# Altium PCB SPI-主板-开关.PcbDoc (part 3 of 11)
Units mm, origin at the board's own origin, x right, y up, seen from the top; angles counter-clockwise.
Board outline 97.69 x 103.45 mm, 2 copper layers (Top Layer, Bottom Layer); 86 components, 63 nets, 260 pads, 250 vias.
Unrouted connection lines stored in the file: 6.
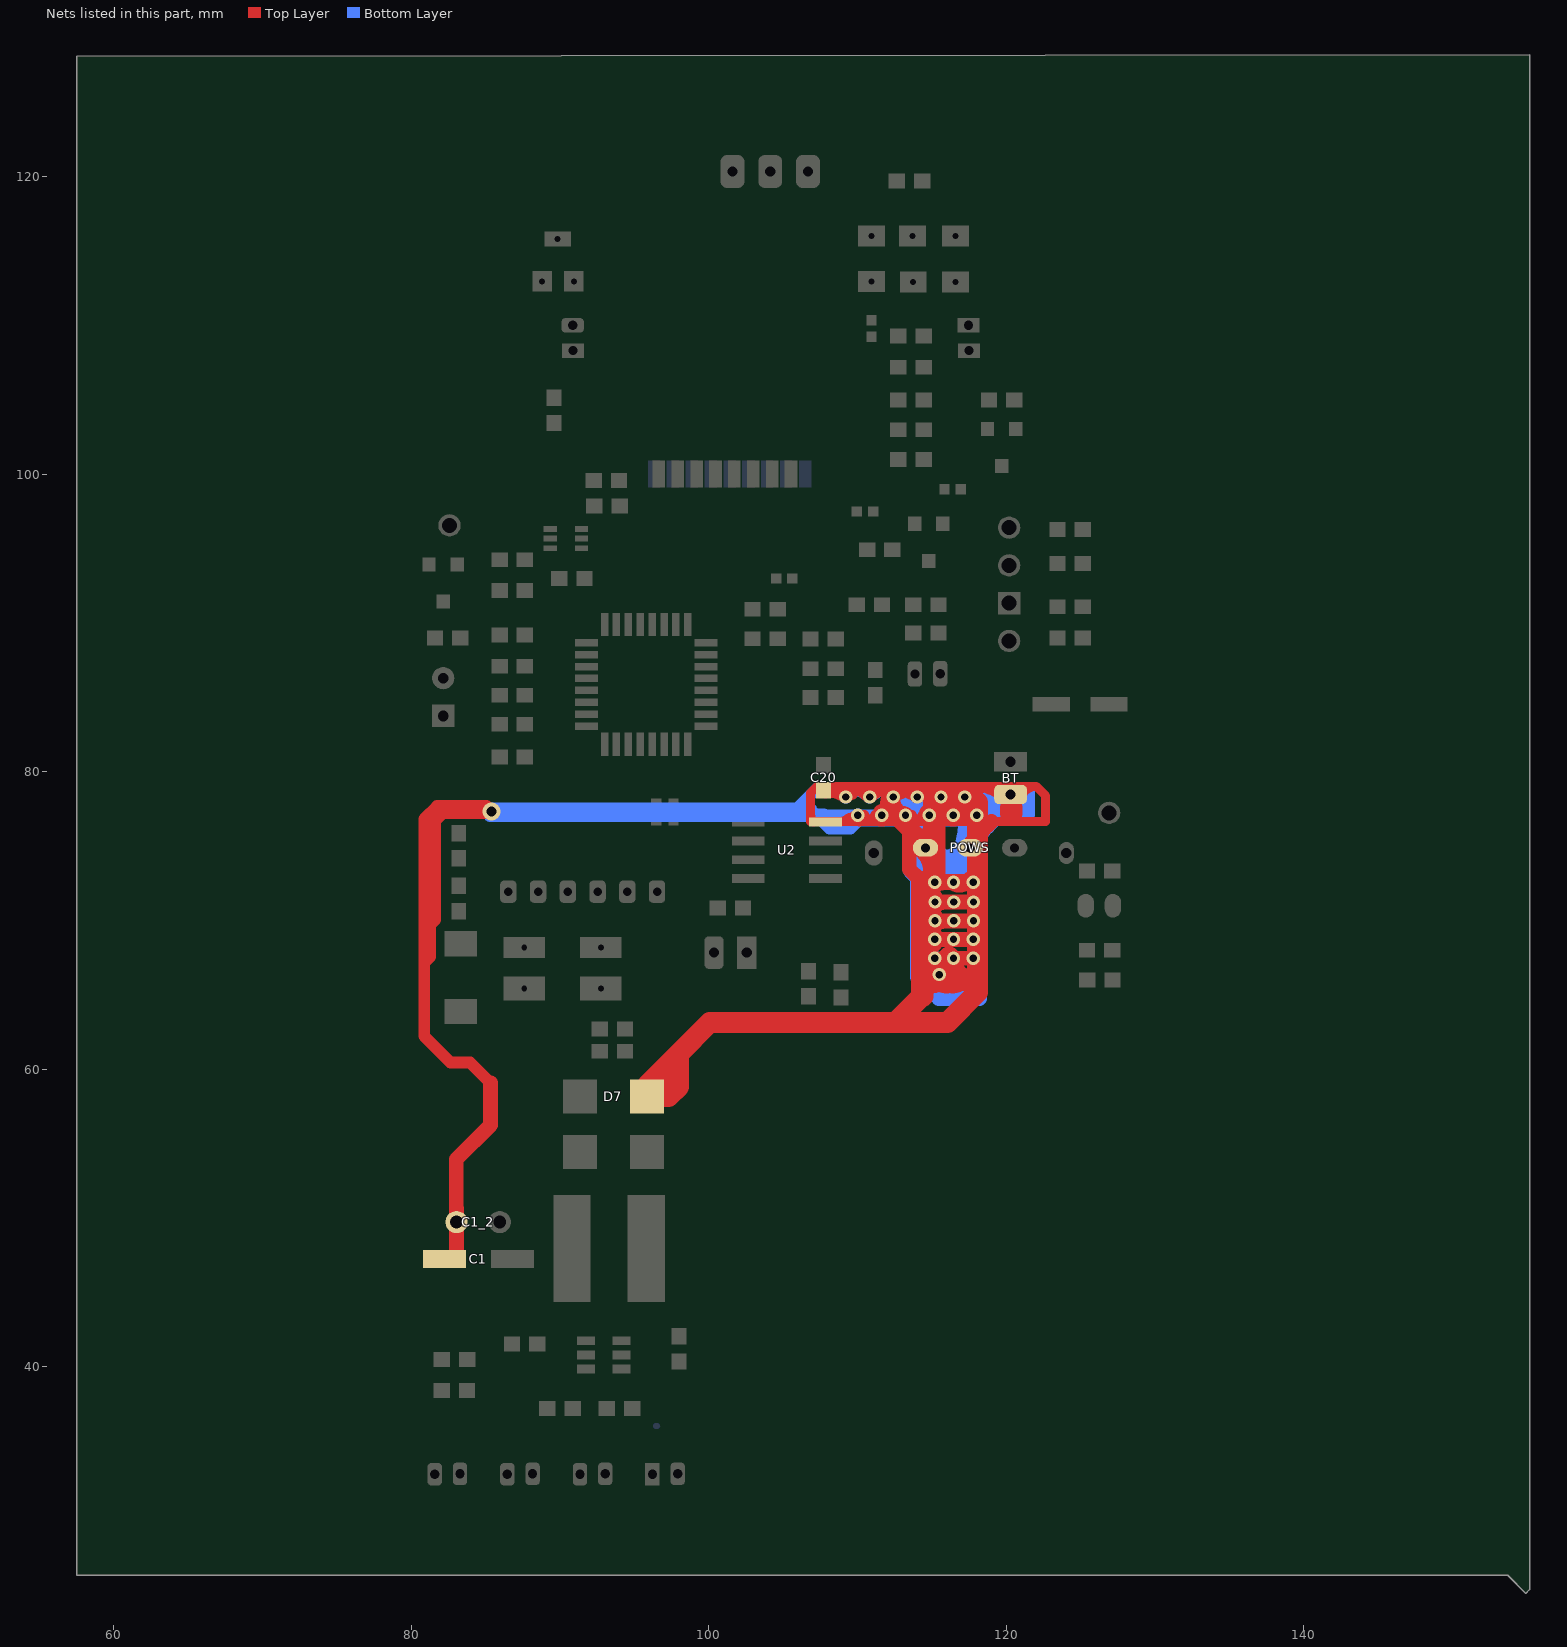
[diagram p3: the nets of this part, all layers, seen from the top]

## Via types
v1: diameter 0.9, hole 0.5, Top Layer to Bottom Layer, 104 vias
v2: diameter 0.68, hole 0.4, Top Layer to Bottom Layer, 100 vias
v3: diameter 1.1, hole 0.6, Top Layer to Bottom Layer, tented both sides, 16 vias
v4: diameter 1, hole 0.8, Top Layer to Bottom Layer, tented both sides, 8 vias
v5: diameter 1, hole 0.6, Top Layer to Bottom Layer, 4 vias
v6: diameter 0.8, hole 0.5, Top Layer to Bottom Layer, 4 vias
v7: diameter 0.7, hole 0.4, Top Layer to Bottom Layer, 4 vias
v8: diameter 0.6, hole 0.4, Top Layer to Bottom Layer, 3 vias
v9: diameter 1.1, hole 0.68, Top Layer to Bottom Layer, 2 vias
v10: diameter 0.8, hole 0.4, Top Layer to Bottom Layer, 2 vias
v11: diameter 1, hole 0.5, Top Layer to Bottom Layer, 1 vias
v12: diameter 0.9, hole 0.6, Top Layer to Bottom Layer, tented bottom, 1 vias
v13: diameter 1.2, hole 0.68, Top Layer to Bottom Layer, 1 vias

## Nets (pads, with @x,y where several pads share a name; then routed paths per layer and width w, separated by ;. In a path a pad name is that pad's centre, name@x,y a point inside that pad or via, vN(x,y) a via of type N, cw(c..) or ccw(c..) an arc to the next point about the centre after c; other vN are vias at no path point) (continued)
BT: BT.1 C1.2 C1_2.2 C20.2 D7.2 POWS.2 POWS.3 U2.4 | length 1187.9
  Top Layer w0.6: 81.255,76.479 81.255,69.698 81.051,69.698 81.051,67.202 81.382,67.532 81.382,69.698 81.712,70.028 81.712,76.81 ; C20.2@107.966,78.844 ccw(c108.78,79.645) 108.771,78.503 ; 108.518,78.491 cw(c108.472,77.635) v1@109.109,78.208 ; v1@109.355,78.24 cw(c109.703,78.061) 109.703,78.453 ; 109.55,76.944 ccw(c109.55,77.336) v1@109.899,77.157 ; v1@110.166,77.157 ccw(c110.515,77.336) 110.515,76.944 ; 111.15,76.944 ccw(c111.15,77.336) v1@111.499,77.157 ; 112.342,76.932 cw(c112.356,77.789) v1@111.74,77.193 ; v1@112.555,78.24 cw(c112.903,78.061) 112.903,78.453 ; 112.75,76.944 ccw(c112.75,77.336) v1@113.099,77.157 ; v1@113.366,77.157 ccw(c113.715,77.336) 113.715,76.944 ; 113.539,78.453 cw(c113.539,78.061) v1@113.887,78.24 ; v1@114.155,78.24 cw(c114.503,78.061) 114.503,78.453 ; 114.35,76.944 ccw(c114.35,77.336) v1@114.699,77.157 ; v1@114.966,77.157 ccw(c115.315,77.336) 115.315,76.944 ; 115.139,78.453 cw(c115.139,78.061) v1@115.487,78.24 ; 115.733,76.892 ccw(c115.67,77.746) v1@116.319,77.187 ; v1@115.755,78.24 cw(c116.103,78.061) 116.103,78.453 ; v1@116.566,77.157 ccw(c116.915,77.336) 116.915,76.944 ; 116.739,78.453 cw(c116.739,78.061) v1@117.087,78.24 ; v1@117.355,78.24 cw(c117.703,78.061) 117.703,78.453 ; 117.55,76.944 ccw(c117.55,77.336) v1@117.899,77.157 ; 106.858,77.101 ccw(c107.528,77.101) U2.4@107.054,76.627 ; 106.858,77.101 ccw(c107.528,77.101) U2.4@107.054,76.627 ; 106.858,77.101 ccw(c107.528,77.101) U2.4@107.054,76.627 ; C20.2@107.29,79.019 cw(c107.29,78.669) C20.2@107.629,78.755 ; C20.2@107.29,79.019 cw(c107.29,76.573) v1@109.109,78.208 ; C20.2@107.29,79.019 cw(c107.29,78.669) C20.2@107.629,78.755 ; C20.2@107.29,79.019 cw(c107.29,76.573) v1@109.109,78.208 ; C20.2@107.29,79.019 cw(c107.29,78.669) C20.2@107.629,78.755 ; C20.2@107.29,79.019 cw(c107.29,76.573) v1@109.109,78.208 ; C20.2@107.29,79.019 106.858,78.588 106.858,76.657 113.005,76.657 ; C20.2@107.29,79.019 122.022,79.019 ; C20.2@107.873,78.51 cw(c108.187,77.298) v1@108.822,78.377 ; C20.2@107.873,78.51 cw(c108.187,77.298) v1@108.822,78.377 ; C20.2@107.873,78.51 cw(c108.187,77.298) v1@108.822,78.377 ; C20.2@107.949,78.959 ccw(c108.209,79.279) 108.415,78.922 ; C20.2@107.949,78.959 ccw(c108.209,79.279) 108.415,78.922 ; C20.2@107.949,78.959 ccw(c108.209,79.279) 108.415,78.922 ; C20.2@107.964,78.662 cw(c108.827,77.8) 108.827,79.019 ; C20.2@107.964,78.662 cw(c108.827,77.8) 108.827,79.019 ; C20.2@107.964,78.662 cw(c108.827,77.8) 108.827,79.019 ; 108.545,78.575 ccw(c109.013,79.293) v1@109.19,78.455 ; 108.545,78.575 ccw(c109.013,79.293) v1@109.19,78.455 ; 108.545,78.575 ccw(c109.013,79.293) v1@109.19,78.455 ; U2.4@108.628,76.657 ccw(c108.628,78.494) v1@109.927,77.195 ; U2.4@108.628,76.657 ccw(c108.628,78.494) v1@109.927,77.195 ; U2.4@108.628,76.657 ccw(c108.628,78.494) v1@109.927,77.195 ; 108.635,79.019 cw(c108.635,77.782) 109.556,78.609 ; 108.635,79.019 cw(c108.635,77.782) 109.556,78.609 ; 108.635,79.019 cw(c108.635,77.782) 109.556,78.609 ; 108.742,79.019 cw(c108.742,76.229) v1@110.715,78.202 ; 108.742,79.019 cw(c108.742,76.229) v1@110.715,78.202 ; 108.742,79.019 cw(c108.742,76.229) v1@110.715,78.202 ; v1@109.327,78.202 cw(c111.3,76.229) 111.3,79.019 ; v1@109.327,78.202 cw(c111.3,76.229) 111.3,79.019 ; v1@109.327,78.202 cw(c111.3,76.229) 111.3,79.019 ; 109.344,76.859 cw(c109.772,76.116) v1@109.994,76.944 ; 109.344,76.859 cw(c109.772,76.116) v1@109.994,76.944 ; 109.344,76.859 cw(c109.772,76.116) v1@109.994,76.944 ; v1@110.071,76.944 cw(c110.293,76.116) 110.722,76.859 ; v1@110.071,76.944 cw(c110.293,76.116) 110.722,76.859 ; v1@110.071,76.944 cw(c110.293,76.116) 110.722,76.859 ; 110.133,76.632 ccw(c110.011,77.087) 110.481,77.13 ; 110.133,76.632 ccw(c110.011,77.087) 110.481,77.13 ; 110.133,76.632 ccw(c110.011,77.087) 110.481,77.13 ; v1@110.139,77.195 ccw(c111.437,78.494) 111.437,76.657 ; v1@110.139,77.195 ccw(c111.437,78.494) 111.437,76.657 ; v1@110.139,77.195 ccw(c111.437,78.494) 111.437,76.657 ; 110.228,76.657 ccw(c110.228,78.494) v1@111.527,77.195 ; 110.228,76.657 ccw(c110.228,78.494) v1@111.527,77.195 ; 110.228,76.657 ccw(c110.228,78.494) v1@111.527,77.195 ; 110.342,79.019 cw(c110.342,76.229) v1@112.315,78.202 ; 110.342,79.019 cw(c110.342,76.229) v1@112.315,78.202 ; 110.342,79.019 cw(c110.342,76.229) v1@112.315,78.202 ; v1@110.927,78.202 cw(c112.9,76.229) 112.9,79.019 ; v1@110.927,78.202 cw(c112.9,76.229) 112.9,79.019 ; v1@110.927,78.202 cw(c112.9,76.229) 112.9,79.019 ; 110.944,76.859 cw(c111.372,76.116) v1@111.594,76.944 ; 110.944,76.859 cw(c111.372,76.116) v1@111.594,76.944 ; 110.944,76.859 cw(c111.372,76.116) v1@111.594,76.944 ; v1@111.669,76.943 cw(c111.877,76.112) 112.318,76.847 ; v1@111.669,76.943 cw(c111.877,76.112) 112.318,76.847 ; v1@111.669,76.943 cw(c111.877,76.112) 112.318,76.847 ; 111.733,76.632 ccw(c111.611,77.087) 112.081,77.13 ; 111.733,76.632 ccw(c111.611,77.087) 112.081,77.13 ; 111.733,76.632 ccw(c111.611,77.087) 112.081,77.13 ; v1@111.74,77.193 ccw(c113.005,78.416) 113.005,76.657 ; v1@111.74,77.193 ccw(c113.005,78.416) 113.005,76.657 ; v1@111.74,77.193 ccw(c113.005,78.416) 113.005,76.657 ; 111.79,79.019 cw(c111.79,77.678) v1@112.739,78.626 ; 111.79,79.019 cw(c111.79,77.678) v1@112.739,78.626 ; 111.79,79.019 cw(c111.79,77.678) v1@112.739,78.626 ; 111.828,76.657 ccw(c111.828,78.494) v1@113.127,77.195 ; 111.828,76.657 ccw(c111.828,78.494) v1@113.127,77.195 ; 111.828,76.657 ccw(c111.828,78.494) v1@113.127,77.195 ; 111.942,79.019 cw(c111.942,76.229) v1@113.915,78.202 ; 111.942,79.019 cw(c111.942,76.229) v1@113.915,78.202 ; 111.942,79.019 cw(c111.942,76.229) v1@113.915,78.202 ; v1@112.103,78.626 cw(c113.052,77.678) 113.052,79.019 ; v1@112.103,78.626 cw(c113.052,77.678) 113.052,79.019 ; v1@112.103,78.626 cw(c113.052,77.678) 113.052,79.019 ; v1@112.46,78.453 ccw(c112.682,79.281) 113.11,78.539 ; v1@112.46,78.453 ccw(c112.682,79.281) 113.11,78.539 ; v1@112.46,78.453 ccw(c112.682,79.281) 113.11,78.539 ; v1@112.527,78.202 cw(c114.5,76.229) 114.5,79.019 ; v1@112.527,78.202 cw(c114.5,76.229) 114.5,79.019 ; v1@112.527,78.202 cw(c114.5,76.229) 114.5,79.019 ; 112.544,76.859 cw(c112.972,76.116) v1@113.194,76.944 ; 112.544,76.859 cw(c112.972,76.116) v1@113.194,76.944 ; 112.544,76.859 cw(c112.972,76.116) v1@113.194,76.944 ; 112.786,77.146 ccw(c113.262,77.085) 113.138,76.621 ; 112.786,77.146 ccw(c113.262,77.085) 113.138,76.621 ; 112.786,77.146 ccw(c113.262,77.085) 113.138,76.621 ; 113.005,76.657 115.164,76.657 ; v1@113.271,76.944 cw(c113.493,76.116) 113.922,76.859 ; v1@113.271,76.944 cw(c113.493,76.116) 113.922,76.859 ; v1@113.271,76.944 cw(c113.493,76.116) 113.922,76.859 ; 113.332,78.539 ccw(c113.76,79.281) v1@113.982,78.453 ; 113.332,78.539 ccw(c113.76,79.281) v1@113.982,78.453 ; 113.332,78.539 ccw(c113.76,79.281) v1@113.982,78.453 ; 113.333,76.632 ccw(c113.211,77.087) 113.681,77.13 ; 113.333,76.632 ccw(c113.211,77.087) 113.681,77.13 ; 113.333,76.632 ccw(c113.211,77.087) 113.681,77.13 ; 113.333,76.632 ccw(c113.211,77.087) 113.681,77.13 ; 113.333,76.632 ccw(c113.211,77.087) 113.681,77.13 ; 113.333,76.632 ccw(c113.211,77.087) 113.681,77.13 ; v1@113.339,77.195 ccw(c114.637,78.494) 114.637,76.657 ; v1@113.339,77.195 ccw(c114.637,78.494) 114.637,76.657 ; v1@113.339,77.195 ccw(c114.637,78.494) 114.637,76.657 ; 113.39,79.019 cw(c113.39,77.678) v1@114.339,78.626 ; 113.39,79.019 cw(c113.39,77.678) v1@114.339,78.626 ; 113.39,79.019 cw(c113.39,77.678) v1@114.339,78.626 ; 113.428,76.657 ccw(c113.428,78.494) v1@114.727,77.195 ; 113.428,76.657 ccw(c113.428,78.494) v1@114.727,77.195 ; 113.428,76.657 ccw(c113.428,78.494) v1@114.727,77.195 ; 113.542,79.019 cw(c113.542,76.229) v1@115.515,78.202 ; 113.542,79.019 cw(c113.542,76.229) v1@115.515,78.202 ; 113.542,79.019 cw(c113.542,76.229) v1@115.515,78.202 ; v1@113.703,78.626 cw(c114.652,77.678) 114.652,79.019 ; v1@113.703,78.626 cw(c114.652,77.678) 114.652,79.019 ; v1@113.703,78.626 cw(c114.652,77.678) 114.652,79.019 ; v1@114.06,78.453 ccw(c114.282,79.281) 114.71,78.539 ; v1@114.06,78.453 ccw(c114.282,79.281) 114.71,78.539 ; v1@114.06,78.453 ccw(c114.282,79.281) 114.71,78.539 ; v1@114.127,78.202 cw(c116.1,76.229) 116.1,79.019 ; v1@114.127,78.202 cw(c116.1,76.229) 116.1,79.019 ; v1@114.127,78.202 cw(c116.1,76.229) 116.1,79.019 ; 114.144,76.859 cw(c114.572,76.116) v1@114.794,76.944 ; 114.144,76.859 cw(c114.572,76.116) v1@114.794,76.944 ; 114.144,76.859 cw(c114.572,76.116) v1@114.794,76.944 ; 114.384,77.13 ccw(c114.854,77.087) 114.732,76.632 ; 114.384,77.13 ccw(c114.854,77.087) 114.732,76.632 ; 114.384,77.13 ccw(c114.854,77.087) 114.732,76.632 ; v1@114.871,76.944 cw(c115.093,76.116) 115.522,76.859 ; v1@114.871,76.944 cw(c115.093,76.116) 115.522,76.859 ; v1@114.871,76.944 cw(c115.093,76.116) 115.522,76.859 ; 114.911,76.589 ccw(c114.781,77.076) 115.269,77.199 ; 114.911,76.589 ccw(c114.781,77.076) 115.269,77.199 ; 114.911,76.589 ccw(c114.781,77.076) 115.269,77.199 ; 114.911,76.589 ccw(c114.781,77.076) 115.269,77.199 ; 114.911,76.589 ccw(c114.781,77.076) 115.269,77.199 ; 114.911,76.589 ccw(c114.781,77.076) 115.269,77.199 ; 114.932,78.539 ccw(c115.36,79.281) v1@115.582,78.453 ; 114.932,78.539 ccw(c115.36,79.281) v1@115.582,78.453 ; 114.932,78.539 ccw(c115.36,79.281) v1@115.582,78.453 ; v1@114.939,77.195 ccw(c116.237,78.494) 116.237,76.657 ; v1@114.939,77.195 ccw(c116.237,78.494) 116.237,76.657 ; v1@114.939,77.195 ccw(c116.237,78.494) 116.237,76.657 ; 114.99,79.019 cw(c114.99,77.678) v1@115.939,78.626 ; 114.99,79.019 cw(c114.99,77.678) v1@115.939,78.626 ; 114.99,79.019 cw(c114.99,77.678) v1@115.939,78.626 ; 115.142,79.019 cw(c115.142,76.229) v1@117.115,78.202 ; 115.142,79.019 cw(c115.142,76.229) v1@117.115,78.202 ; 115.142,79.019 cw(c115.142,76.229) v1@117.115,78.202 ; 115.164,76.657 ccw(c115.164,78.182) v1@116.319,77.187 ; 115.164,76.657 ccw(c115.164,78.182) v1@116.319,77.187 ; 115.164,76.657 ccw(c115.164,78.182) v1@116.319,77.187 ; 115.164,76.657 119.024,76.657 ; v1@115.303,78.626 cw(c116.252,77.678) 116.252,79.019 ; v1@115.303,78.626 cw(c116.252,77.678) 116.252,79.019 ; v1@115.303,78.626 cw(c116.252,77.678) 116.252,79.019 ; v1@115.727,78.202 cw(c117.7,76.229) 117.7,79.019 ; v1@115.727,78.202 cw(c117.7,76.229) 117.7,79.019 ; v1@115.727,78.202 cw(c117.7,76.229) 117.7,79.019 ; 115.763,76.808 cw(c116.245,76.1) v1@116.405,76.942 ; 115.763,76.808 cw(c116.245,76.1) v1@116.405,76.942 ; 115.763,76.808 cw(c116.245,76.1) v1@116.405,76.942 ; 115.984,77.13 ccw(c116.454,77.087) 116.332,76.632 ; 115.984,77.13 ccw(c116.454,77.087) 116.332,76.632 ; 115.984,77.13 ccw(c116.454,77.087) 116.332,76.632 ; v1@116.471,76.944 cw(c116.693,76.116) 117.122,76.859 ; v1@116.471,76.944 cw(c116.693,76.116) 117.122,76.859 ; v1@116.471,76.944 cw(c116.693,76.116) 117.122,76.859 ; 116.532,78.539 ccw(c116.96,79.281) v1@117.182,78.453 ; 116.532,78.539 ccw(c116.96,79.281) v1@117.182,78.453 ; 116.532,78.539 ccw(c116.96,79.281) v1@117.182,78.453 ; 116.533,76.632 ccw(c116.411,77.087) 116.881,77.13 ; 116.533,76.632 ccw(c116.411,77.087) 116.881,77.13 ; 116.533,76.632 ccw(c116.411,77.087) 116.881,77.13 ; 116.533,76.632 ccw(c116.411,77.087) 116.881,77.13 ; 116.533,76.632 ccw(c116.411,77.087) 116.881,77.13 ; 116.533,76.632 ccw(c116.411,77.087) 116.881,77.13 ; v1@116.539,77.195 ccw(c117.837,78.494) 117.837,76.657 ; v1@116.539,77.195 ccw(c117.837,78.494) 117.837,76.657 ; v1@116.539,77.195 ccw(c117.837,78.494) 117.837,76.657 ; 116.59,79.019 cw(c116.59,77.678) v1@117.539,78.626 ; 116.59,79.019 cw(c116.59,77.678) v1@117.539,78.626 ; 116.59,79.019 cw(c116.59,77.678) v1@117.539,78.626 ; 116.628,76.657 ccw(c116.628,78.494) v1@117.927,77.195 ; 116.628,76.657 ccw(c116.628,78.494) v1@117.927,77.195 ; 116.628,76.657 ccw(c116.628,78.494) v1@117.927,77.195 ; v1@116.903,78.626 cw(c117.852,77.678) 117.852,79.019 ; v1@116.903,78.626 cw(c117.852,77.678) 117.852,79.019 ; v1@116.903,78.626 cw(c117.852,77.678) 117.852,79.019 ; v1@117.26,78.453 ccw(c117.482,79.281) 117.91,78.539 ; v1@117.26,78.453 ccw(c117.482,79.281) 117.91,78.539 ; v1@117.26,78.453 ccw(c117.482,79.281) 117.91,78.539 ; v1@117.327,78.202 cw(c119.3,76.229) BT.1@119.3,79.019 ; v1@117.327,78.202 cw(c119.3,76.229) BT.1@119.3,79.019 ; v1@117.327,78.202 cw(c119.3,76.229) BT.1@119.3,79.019 ; 117.344,76.859 cw(c117.772,76.116) v1@117.994,76.944 ; 117.344,76.859 cw(c117.772,76.116) v1@117.994,76.944 ; 117.344,76.859 cw(c117.772,76.116) v1@117.994,76.944 ; 117.584,77.13 ccw(c118.054,77.087) 117.932,76.632 ; 117.584,77.13 ccw(c118.054,77.087) 117.932,76.632 ; 117.584,77.13 ccw(c118.054,77.087) 117.932,76.632 ; 117.924,79.019 cw(c117.924,76.646) BT.1@119.602,78.324 ; 117.924,79.019 cw(c117.924,76.646) BT.1@119.602,78.324 ; 117.924,79.019 cw(c117.924,76.646) BT.1@119.602,78.324 ; v1@118.059,76.941 cw(c118.152,76.433) 118.522,76.793 ; v1@118.059,76.941 cw(c118.152,76.433) 118.522,76.793 ; v1@118.059,76.941 cw(c118.152,76.433) 118.522,76.793 ; v1@118.164,77.162 ccw(c119.024,77.643) 119.024,76.657 ; v1@118.164,77.162 ccw(c119.024,77.643) 119.024,76.657 ; v1@118.164,77.162 ccw(c119.024,77.643) 119.024,76.657 ; 118.708,78.841 ccw(c119.164,79.631) BT.1@119.66,78.865 ; 118.708,78.841 ccw(c119.164,79.631) BT.1@119.66,78.865 ; 118.708,78.841 ccw(c119.164,79.631) BT.1@119.66,78.865 ; 119.024,76.657 122.657,76.657 122.657,78.384 122.022,79.019 ; BT.1@119.373,79.019 cw(c119.373,78.095) BT.1@120.027,78.749 ; BT.1@119.373,79.019 cw(c119.373,78.095) BT.1@120.027,78.749 ; BT.1@119.373,79.019 cw(c119.373,78.095) BT.1@120.027,78.749 ; BT.1@120.978,78.838 ccw(c121.199,79.096) 121.457,78.873 ; BT.1@120.978,78.838 ccw(c121.199,79.096) 121.457,78.873 ; BT.1@120.978,78.838 ccw(c121.199,79.096) 121.457,78.873 ; BT.1@121.065,78.419 cw(c122.022,77.957) 122.022,79.019 ; BT.1@121.065,78.419 cw(c122.022,77.957) 122.022,79.019 ; BT.1@121.065,78.419 cw(c122.022,77.957) 122.022,79.019 ; 111.184,77.13 ccw(c111.654,77.087) 111.532,76.632 cw(c111.654,77.087) 111.184,77.13
  Top Layer w0.8: 85.327,59.098 83.972,60.452 82.652,60.452 80.874,62.23 80.874,76.835 81.737,77.699 83.566,77.699 ; 83.566,77.699 83.82,77.445 82.208,77.445 81.712,76.949 81.712,76.81 82.134,77.232 85.531,77.232 85.065,77.699 83.566,77.699 ; 84.046,77.699 cw(c84.046,76.002) v13@85.246,77.202 ; 84.046,77.699 cw(c84.046,76.002) v13@85.246,77.202 ; 84.046,77.699 cw(c84.046,76.002) v13@85.246,77.202 ; 84.582,77.585 ccw(c85.006,78.32) v13@85.315,77.529 ; 84.582,77.585 ccw(c85.006,78.32) v13@85.315,77.529 ; 84.582,77.585 ccw(c85.006,78.32) v13@85.315,77.529 ; 84.636,77.232 ccw(c84.636,78.094) v13@85.246,77.484 ; 84.636,77.232 ccw(c84.636,78.094) v13@85.246,77.484 ; 84.636,77.232 ccw(c84.636,78.094) v13@85.246,77.484
  Top Layer w1: C1_2.2@83.033,49.727 83.033,53.95 85.327,56.244 85.327,59.098 ; 83.05,47.898 C1_2.2@83.05,49.727 83.05,50.656 ; 113.487,76.175 113.487,73.457 114.351,72.593 ; 113.887,73.057 ccw(c115.189,74.359) v1@115.189,72.518 ; v1@114.859,72.517 115.672,72.517 ; v1@114.884,69.926 115.697,69.926 ; v1@114.884,71.196 115.697,71.196 ; v1@115.164,72.644 v1@117.373,72.644 ; 115.672,67.462 v1(116.459,67.462) v1(117.78,67.462) v1@117.881,67.462 ; 115.672,68.732 v1(116.459,68.732) v1(117.78,68.732) v1@117.881,68.732 ; 115.672,72.568 v1(116.459,72.568) v1(117.78,72.568) v1@117.881,72.568 ; 115.697,69.977 v1(116.484,69.977) v1(117.805,69.977) v1@117.907,69.977 ; 115.697,71.247 v1(116.484,71.247) v1(117.805,71.247) v1@117.907,71.247 ; POWS.2@118,74.66 ccw(c118.502,74.304) 118.041,73.895 ; POWS.2@118.054,75.017 cw(c118.871,75.287) 118.262,75.895 ; 118.237,66.192 118.237,73.127 ; 119.024,76.657 118.262,75.895 ; v1@113.268,77.124 cw(c112.739,76.595) 113.487,76.595 ; v1@113.268,77.124 cw(c112.739,76.595) 113.487,76.595 ; v1@113.268,77.124 cw(c112.739,76.595) 113.487,76.595 ; v1@113.268,77.124 cw(c112.739,76.595) 113.487,76.595 ; v1@113.268,77.124 cw(c112.739,76.595) 113.487,76.595 ; v1@113.268,77.124 cw(c112.739,76.595) 113.487,76.595 ; 114.351,72.593 ccw(c114.823,73.065) v1@115.219,72.528 ; 114.351,72.593 ccw(c114.823,73.065) v1@115.219,72.528 ; 114.351,72.593 ccw(c114.823,73.065) v1@115.219,72.528 ; v1@116.429,72.528 ccw(c116.864,73.103) v1@117.373,72.593 ; v1@116.429,72.528 ccw(c116.864,73.103) v1@117.373,72.593 ; v1@116.429,72.528 ccw(c116.864,73.103) v1@117.373,72.593 ; v1@116.446,72.519 ccw(c116.757,73.692) v1@117.615,72.834 ; v1@116.446,72.519 ccw(c116.757,73.692) v1@117.615,72.834 ; v1@116.446,72.519 ccw(c116.757,73.692) v1@117.615,72.834 ; 117.227,72.611 cw(c117.516,72.111) v1@117.805,72.611 ; 117.227,72.611 cw(c117.516,72.111) v1@117.805,72.611 ; 117.227,72.611 cw(c117.516,72.111) v1@117.805,72.611 ; 117.227,72.611 cw(c117.516,72.111) v1@117.805,72.611 ; 117.227,72.611 cw(c117.516,72.111) v1@117.805,72.611 ; 117.227,72.611 cw(c117.516,72.111) v1@117.805,72.611 ; 117.301,72.551 cw(c117.625,71.99) v1@117.793,72.616 ; 117.301,72.551 cw(c117.625,71.99) v1@117.793,72.616 ; 117.301,72.551 cw(c117.625,71.99) v1@117.793,72.616 ; 117.301,72.551 cw(c117.625,71.99) v1@117.793,72.616 ; 117.301,72.551 cw(c117.625,71.99) v1@117.793,72.616 ; 117.301,72.551 cw(c117.625,71.99) v1@117.793,72.616 ; v1@117.373,72.593 v1@117.615,72.834 ; v1@117.615,72.834 117.945,72.834 118.237,73.127 ; v1@117.615,72.834 118.237,73.457 ; v1@117.73,72.568 cw(c118.652,72.568) 118,73.22 ; v1@117.73,72.568 cw(c118.652,72.568) 118,73.22 ; v1@117.73,72.568 cw(c118.652,72.568) 118,73.22 ; v1@117.794,72.52 ccw(c117.602,73.152) 118.262,73.152 ; v1@117.794,72.52 ccw(c117.602,73.152) 118.262,73.152 ; v1@117.794,72.52 ccw(c117.602,73.152) 118.262,73.152 ; v1@117.795,72.52 ccw(c117.6,73.127) 118.237,73.127 ; v1@117.795,72.52 ccw(c117.6,73.127) 118.237,73.127 ; v1@117.795,72.52 ccw(c117.6,73.127) 118.237,73.127 ; v1@117.795,72.52 ccw(c117.6,73.127) 118.237,73.127 ; v1@117.795,72.52 ccw(c117.6,73.127) 118.237,73.127 ; v1@117.795,72.52 ccw(c117.6,73.127) 118.237,73.127 ; v1@117.811,67.423 ccw(c117.346,68.011) 118.022,68.335 ; v1@117.811,67.423 ccw(c117.346,68.011) 118.022,68.335 ; v1@117.811,67.423 ccw(c117.346,68.011) 118.022,68.335 ; v1@117.811,68.772 cw(c117.346,68.183) 118.022,67.86 ; v1@117.811,68.772 cw(c117.346,68.183) 118.022,67.86 ; v1@117.811,68.772 cw(c117.346,68.183) 118.022,67.86 ; v1@117.811,68.772 cw(c117.346,68.183) 118.022,67.86 ; v1@117.811,68.772 cw(c117.346,68.183) 118.022,67.86 ; v1@117.811,68.772 cw(c117.346,68.183) 118.022,67.86 ; v1@117.812,72.53 ccw(c117.013,73.457) 118.237,73.457 ; v1@117.812,72.53 ccw(c117.013,73.457) 118.237,73.457 ; v1@117.812,72.53 ccw(c117.013,73.457) 118.237,73.457 ; v1@117.815,67.427 ccw(c116.797,68.445) 118.237,68.445 ; v1@117.815,67.427 ccw(c116.797,68.445) 118.237,68.445 ; v1@117.815,67.427 ccw(c116.797,68.445) 118.237,68.445 ; v1@117.815,67.498 cw(c116.797,66.479) 118.237,66.479 ; v1@117.815,67.498 cw(c116.797,66.479) 118.237,66.479 ; v1@117.815,67.498 cw(c116.797,66.479) 118.237,66.479 ; v1@117.815,68.697 ccw(c116.797,69.715) 118.237,69.715 ; v1@117.815,68.697 ccw(c116.797,69.715) 118.237,69.715 ; v1@117.815,68.697 ccw(c116.797,69.715) 118.237,69.715 ; v1@117.815,68.768 cw(c116.797,67.749) 118.237,67.749 ; v1@117.815,68.768 cw(c116.797,67.749) 118.237,67.749 ; v1@117.815,68.768 cw(c116.797,67.749) 118.237,67.749 ; v1@117.815,72.532 ccw(c116.735,73.612) 118.262,73.612 ; v1@117.815,72.532 ccw(c116.735,73.612) 118.262,73.612 ; v1@117.815,72.532 ccw(c116.735,73.612) 118.262,73.612 ; v1@117.815,72.603 cw(c116.797,71.585) 118.237,71.585 ; v1@117.815,72.603 cw(c116.797,71.585) 118.237,71.585 ; v1@117.815,72.603 cw(c116.797,71.585) 118.237,71.585 ; v1@117.841,69.942 ccw(c116.883,70.899) 118.237,70.899 ; v1@117.841,69.942 ccw(c116.883,70.899) 118.237,70.899 ; v1@117.841,69.942 ccw(c116.883,70.899) 118.237,70.899 ; v1@117.841,70.012 cw(c116.883,69.055) 118.237,69.055 ; v1@117.841,70.012 cw(c116.883,69.055) 118.237,69.055 ; v1@117.841,70.012 cw(c116.883,69.055) 118.237,69.055 ; v1@117.841,71.212 ccw(c116.883,72.169) 118.237,72.169 ; v1@117.841,71.212 ccw(c116.883,72.169) 118.237,72.169 ; v1@117.841,71.212 ccw(c116.883,72.169) 118.237,72.169 ; v1@117.841,71.282 cw(c116.883,70.325) 118.237,70.325 ; v1@117.841,71.282 cw(c116.883,70.325) 118.237,70.325 ; v1@117.841,71.282 cw(c116.883,70.325) 118.237,70.325 ; POWS.2@118.074,74.892 cw(c120.042,74.892) 118.65,76.283 ; POWS.2@118.074,74.892 cw(c120.042,74.892) 118.65,76.283 ; POWS.2@118.074,74.892 cw(c120.042,74.892) 118.65,76.283 ; 118.237,73.127 118.262,73.152 ; 118.237,73.127 118.237,73.457 ; 118.262,73.152 118.262,75.895 ; 118.262,75.895 cw(c117.659,75.895) 117.668,75.292 ccw(c117.659,75.895) 118.262,75.895
  Top Layer w1.2: 112.166,77.292 112.37,77.292 ; v1@111.633,77.239 cw(c111.633,75.331) 112.982,76.68 ; v1@111.633,77.239 cw(c111.633,75.331) 112.982,76.68 ; v1@111.633,77.239 cw(c111.633,75.331) 112.982,76.68 ; v1@112.271,78.308 ccw(c114.486,78.308) 112.92,76.742 ; v1@112.271,78.308 ccw(c114.486,78.308) 112.92,76.742 ; v1@112.271,78.308 ccw(c114.486,78.308) 112.92,76.742 ; v1@112.303,78.401 ccw(c112.961,77.884) 112.37,77.292 ; v1@112.303,78.401 ccw(c112.961,77.884) 112.37,77.292 ; v1@112.303,78.401 ccw(c112.961,77.884) 112.37,77.292 ; 112.366,77.036 ccw(c112.921,77.996) v1@113.281,76.947 ; 112.366,77.036 ccw(c112.921,77.996) v1@113.281,76.947 ; 112.366,77.036 ccw(c112.921,77.996) v1@113.281,76.947 ; 112.37,77.292 ccw(c113.222,78.145) v1@113.234,76.939 ; 112.37,77.292 ccw(c113.222,78.145) v1@113.234,76.939 ; 112.37,77.292 ccw(c113.222,78.145) v1@113.234,76.939 ; 112.37,77.292 113.005,76.657 114.174,75.488 113.753,75.909 ; 112.492,77.482 ccw(c113.493,78.06) v1@113.194,76.944 ; 112.492,77.482 ccw(c113.493,78.06) v1@113.194,76.944 ; 112.492,77.482 ccw(c113.493,78.06) v1@113.194,76.944 ; 112.492,77.482 ccw(c113.493,78.06) v1@113.194,76.944 ; 112.492,77.482 ccw(c113.493,78.06) v1@113.194,76.944 ; 112.492,77.482 ccw(c113.493,78.06) v1@113.194,76.944 ; v1@113.083,77.089 ccw(c114.313,77.089) 113.443,76.219 ; v1@113.083,77.089 ccw(c114.313,77.089) 113.443,76.219 ; v1@113.083,77.089 ccw(c114.313,77.089) 113.443,76.219 ; 113.753,75.909 cw(c112.735,74.892) 114.174,74.892 ccw(c112.735,74.892) 113.753,75.909 ; v1@114.727,77.195 cw(c116.003,75.918) 116.003,77.724 ; v1@114.727,77.195 cw(c116.003,75.918) 116.003,77.724 ; v1@114.727,77.195 cw(c116.003,75.918) 116.003,77.724 ; 115.164,77.724 ccw(c115.164,78.332) v1@115.771,78.3 ; 115.164,77.724 ccw(c115.164,78.332) v1@115.771,78.3 ; 115.164,77.724 ccw(c115.164,78.332) v1@115.771,78.3 ; 115.164,77.724 117.932,77.724 ; 115.262,77.724 cw(c115.262,75.918) v1@116.539,77.195 ; 115.262,77.724 cw(c115.262,75.918) v1@116.539,77.195 ; 115.262,77.724 cw(c115.262,75.918) v1@116.539,77.195 ; v1@115.515,78.202 ccw(c116.669,79.356) 116.669,77.724 ; v1@115.515,78.202 ccw(c116.669,79.356) 116.669,77.724 ; v1@115.515,78.202 ccw(c116.669,79.356) 116.669,77.724 ; 116.173,77.724 ccw(c116.173,79.356) v1@117.327,78.202 ; 116.173,77.724 ccw(c116.173,79.356) v1@117.327,78.202 ; 116.173,77.724 ccw(c116.173,79.356) v1@117.327,78.202 ; v1@116.327,77.195 cw(c117.603,75.918) 117.603,77.724 ; v1@116.327,77.195 cw(c117.603,75.918) 117.603,77.724 ; v1@116.327,77.195 cw(c117.603,75.918) 117.603,77.724 ; 116.862,77.724 cw(c116.862,75.918) v1@118.139,77.195 ; 116.862,77.724 cw(c116.862,75.918) v1@118.139,77.195 ; 116.862,77.724 cw(c116.862,75.918) v1@118.139,77.195 ; v1@117.088,78.24 ccw(c117.932,78.674) 117.932,77.724 ; v1@117.088,78.24 ccw(c117.932,78.674) 117.932,77.724 ; v1@117.088,78.24 ccw(c117.932,78.674) 117.932,77.724
  Top Layer w1.4: D7.2@95.91,57.836 D7.2@95.91,58.166 ; 114.351,64.922 112.573,63.144 ; 118.085,77.927 118.085,65.176 116.053,63.144 112.573,63.144 ; D7.2@95.91,58.166 97.307,58.166 97.993,58.852 97.993,61.062 ; D7.2@95.91,58.166 D7.2@95.85,58.166 96.876,59.182 96.876,59.944 ; D7.2@95.91,58.166 95.91,58.979 96.876,59.944 ; 96.876,59.944 97.993,61.062 ; 97.993,61.062 100.076,63.144 112.573,63.144
  Top Layer w1.5: 114.351,64.922 114.351,72.593 ; POWS.3@114.568,74.786 cw(c113.13,73.348) 115.164,73.348 ; 114.992,65.862 ccw(c114.992,66.872) v1@115.706,66.158 ; v1@115.164,72.593 115.164,72.644 115.164,76.657 115.164,77.724 ; 120.345,77.216 120.345,77.572 ; 114.351,67.433 cw(c116.488,67.433) v1@114.977,68.945 ; 114.351,67.433 cw(c116.488,67.433) v1@114.977,68.945 ; 114.351,67.433 cw(c116.488,67.433) v1@114.977,68.945 ; 114.351,68.405 ccw(c117.529,68.405) v1@115.282,66.158 ; 114.351,68.405 ccw(c117.529,68.405) v1@115.282,66.158 ; 114.351,68.405 ccw(c117.529,68.405) v1@115.282,66.158 ; 114.351,68.616 cw(c116.575,68.616) v1@115.002,70.189 ; 114.351,68.616 cw(c116.575,68.616) v1@115.002,70.189 ; 114.351,68.616 cw(c116.575,68.616) v1@115.002,70.189 ; 114.351,68.762 ccw(c116.488,68.762) v1@114.977,67.25 ; 114.351,68.762 ccw(c116.488,68.762) v1@114.977,67.25 ; 114.351,68.762 ccw(c116.488,68.762) v1@114.977,67.25 ; 114.351,69.886 cw(c116.575,69.886) v1@115.002,71.459 ; 114.351,69.886 cw(c116.575,69.886) v1@115.002,71.459 ; 114.351,69.886 cw(c116.575,69.886) v1@115.002,71.459 ; 114.351,70.032 ccw(c116.488,70.032) v1@114.977,68.52 ; 114.351,70.032 ccw(c116.488,70.032) v1@114.977,68.52 ; 114.351,70.032 ccw(c116.488,70.032) v1@114.977,68.52 ; 114.351,71.268 cw(c116.488,71.268) v1@114.977,72.78 ; 114.351,71.268 cw(c116.488,71.268) v1@114.977,72.78 ; 114.351,71.268 cw(c116.488,71.268) v1@114.977,72.78 ; 114.351,71.338 ccw(c116.575,71.338) v1@115.002,69.765 ; 114.351,71.338 ccw(c116.575,71.338) v1@115.002,69.765 ; 114.351,71.338 ccw(c116.575,71.338) v1@115.002,69.765 ; 114.351,72.593 ccw(c116.54,72.593) v1@115.004,71.033 ; 114.351,72.593 ccw(c116.54,72.593) v1@115.004,71.033 ; 114.351,72.593 ccw(c116.54,72.593) v1@115.004,71.033 ; 115.164,77.928 cw(c116.001,77.928) v1@115.409,78.52 ; 115.164,77.928 cw(c116.001,77.928) v1@115.409,78.52 ; 115.164,77.928 cw(c116.001,77.928) v1@115.409,78.52 ; 115.164,77.928 cw(c116.001,77.928) v1@115.409,78.52 ; 115.164,77.928 cw(c116.001,77.928) v1@115.409,78.52 ; 115.164,77.928 cw(c116.001,77.928) v1@115.409,78.52 ; v1@115.282,66.158 ccw(c115.996,66.872) 115.996,65.862 ; v1@115.282,66.158 ccw(c115.996,66.872) 115.996,65.862 ; v1@115.282,66.158 ccw(c115.996,66.872) 115.996,65.862 ; v1@115.494,66.67 cw(c115.494,64.451) 117.063,66.02 ; v1@115.494,66.67 cw(c115.494,64.451) 117.063,66.02 ; v1@115.494,66.67 cw(c115.494,64.451) 117.063,66.02 ; v1@116.159,67.462 ccw(c117.458,67.462) 116.54,66.544 ; v1@116.159,67.462 ccw(c117.458,67.462) 116.54,66.544 ; v1@116.159,67.462 ccw(c117.458,67.462) 116.54,66.544 ; v1@116.164,67.517 ccw(c117.124,67.34) 116.434,66.65 ; v1@116.164,67.517 ccw(c117.124,67.34) 116.434,66.65 ; v1@116.164,67.517 ccw(c117.124,67.34) 116.434,66.65 ; 116.41,65.862 ccw(c116.41,66.699) 117.001,66.107 ; 116.41,65.862 ccw(c116.41,66.699) 117.001,66.107 ; 116.41,65.862 ccw(c116.41,66.699) 117.001,66.107 ; 116.41,65.862 ccw(c116.41,66.699) 117.001,66.107 ; 116.41,65.862 ccw(c116.41,66.699) 117.001,66.107 ; 116.41,65.862 ccw(c116.41,66.699) 117.001,66.107 ; POWS.3@114.568,74.998 ccw(c113.13,76.436) 115.164,76.436 cw(c113.13,76.436) POWS.3@114.568,74.998
  Bottom Layer w0.8: 105.693,77.27 105.896,77.473 107.34,78.918 117.132,78.918 ; 106.829,77.473 107.224,77.079 108.128,76.175 109.525,76.175 v1@110.058,76.708 ; v1@110.338,76.987 v1@110.058,76.708 ; 118.389,76.683 118.389,76.708 ; 121.219,77.079 120.828,77.079 119.771,77.079 118.785,77.079 v1@118.415,77.079 ; 107.629,78.918 cw(c107.629,76.716) v1@109.186,78.273 ; 107.629,78.918 cw(c107.629,76.716) v1@109.186,78.273 ; 107.629,78.918 cw(c107.629,76.716) v1@109.186,78.273 ; 108.992,76.708 ccw(c108.992,78.13) v1@109.997,77.124 ; 108.992,76.708 ccw(c108.992,78.13) v1@109.997,77.124 ; 108.992,76.708 ccw(c108.992,78.13) v1@109.997,77.124 ; 109.229,78.918 cw(c109.229,76.716) v1@110.786,78.273 ; 109.229,78.918 cw(c109.229,76.716) v1@110.786,78.273 ; 109.229,78.918 cw(c109.229,76.716) v1@110.786,78.273 ; v1@109.256,78.273 cw(c110.813,76.716) 110.813,78.918 ; v1@109.256,78.273 cw(c110.813,76.716) 110.813,78.918 ; v1@109.256,78.273 cw(c110.813,76.716) 110.813,78.918 ; 109.66,76.31 ccw(c108.88,77.089) v1@109.983,77.089 ; 109.66,76.31 ccw(c108.88,77.089) v1@109.983,77.089 ; 109.66,76.31 ccw(c108.88,77.089) v1@109.983,77.089 ; v1@110.058,76.708 108.102,76.708 107.732,77.079 113.995,77.079 118.389,77.079 v1@118.415,77.079 ; v1@110.058,76.708 113.995,76.708 ; v1@110.068,77.124 ccw(c111.073,78.13) 111.073,76.708 ; v1@110.068,77.124 ccw(c111.073,78.13) 111.073,76.708 ; v1@110.068,77.124 ccw(c111.073,78.13) 111.073,76.708 ; 110.592,76.708 ccw(c110.592,78.13) v1@111.597,77.124 ; 110.592,76.708 ccw(c110.592,78.13) v1@111.597,77.124 ; 110.592,76.708 ccw(c110.592,78.13) v1@111.597,77.124 ; 110.829,78.918 cw(c110.829,76.716) v1@112.386,78.273 ; 110.829,78.918 cw(c110.829,76.716) v1@112.386,78.273 ; 110.829,78.918 cw(c110.829,76.716) v1@112.386,78.273 ; v1@110.856,78.273 cw(c112.413,76.716) 112.413,78.918 ; v1@110.856,78.273 cw(c112.413,76.716) 112.413,78.918 ; v1@110.856,78.273 cw(c112.413,76.716) 112.413,78.918 ; v1@111.668,77.124 ccw(c112.673,78.13) 112.673,76.708 ; v1@111.668,77.124 ccw(c112.673,78.13) 112.673,76.708 ; v1@111.668,77.124 ccw(c112.673,78.13) 112.673,76.708 ; 112.192,76.708 ccw(c112.192,78.13) v1@113.197,77.124 ; 112.192,76.708 ccw(c112.192,78.13) v1@113.197,77.124 ; 112.192,76.708 ccw(c112.192,78.13) v1@113.197,77.124 ; 112.429,78.918 cw(c112.429,76.716) v1@113.986,78.273 ; 112.429,78.918 cw(c112.429,76.716) v1@113.986,78.273 ; 112.429,78.918 cw(c112.429,76.716) v1@113.986,78.273 ; v1@112.456,78.273 cw(c114.013,76.716) 114.013,78.918 ; v1@112.456,78.273 cw(c114.013,76.716) 114.013,78.918 ; v1@112.456,78.273 cw(c114.013,76.716) 114.013,78.918 ; v1@113.275,77.115 ccw(c113.995,77.548) 113.995,76.708 ; v1@113.275,77.115 ccw(c113.995,77.548) 113.995,76.708 ; v1@113.275,77.115 ccw(c113.995,77.548) 113.995,76.708 ; 113.995,76.708 ccw(c113.995,77.687) v1@114.792,77.118 ; 113.995,76.708 ccw(c113.995,77.687) v1@114.792,77.118 ; 113.995,76.708 ccw(c113.995,77.687) v1@114.792,77.118 ; 113.995,76.708 118.389,76.708 ; 114.029,78.918 cw(c114.029,76.716) v1@115.586,78.273 ; 114.029,78.918 cw(c114.029,76.716) v1@115.586,78.273 ; 114.029,78.918 cw(c114.029,76.716) v1@115.586,78.273 ; v1@114.056,78.273 cw(c115.613,76.716) 115.613,78.918 ; v1@114.056,78.273 cw(c115.613,76.716) 115.613,78.918 ; v1@114.056,78.273 cw(c115.613,76.716) 115.613,78.918 ; v1@114.868,77.124 ccw(c115.873,78.13) 115.873,76.708 ; v1@114.868,77.124 ccw(c115.873,78.13) 115.873,76.708 ; v1@114.868,77.124 ccw(c115.873,78.13) 115.873,76.708 ; 115.392,76.708 ccw(c115.392,78.13) v1@116.397,77.124 ; 115.392,76.708 ccw(c115.392,78.13) v1@116.397,77.124 ; 115.392,76.708 ccw(c115.392,78.13) v1@116.397,77.124 ; 115.629,78.918 cw(c115.629,76.716) v1@117.186,78.273 ; 115.629,78.918 cw(c115.629,76.716) v1@117.186,78.273 ; 115.629,78.918 cw(c115.629,76.716) v1@117.186,78.273 ; v1@115.658,78.274 cw(c117.132,76.907) 117.132,78.918 ; v1@115.658,78.274 cw(c117.132,76.907) 117.132,78.918 ; v1@115.658,78.274 cw(c117.132,76.907) 117.132,78.918 ; v1@116.468,77.124 ccw(c117.473,78.13) 117.473,76.708 ; v1@116.468,77.124 ccw(c117.473,78.13) 117.473,76.708 ; v1@116.468,77.124 ccw(c117.473,78.13) 117.473,76.708 ; 116.992,76.708 ccw(c116.992,78.13) v1@117.997,77.124 ; 116.992,76.708 ccw(c116.992,78.13) v1@117.997,77.124 ; 116.992,76.708 ccw(c116.992,78.13) v1@117.997,77.124 ; 117.132,78.918 cw(c116.814,78.599) v1@117.18,78.337 ; 117.132,78.918 cw(c116.814,78.599) v1@117.18,78.337 ; 117.132,78.918 cw(c116.814,78.599) v1@117.18,78.337 ; 117.132,78.918 121.552,78.918 ; 117.132,78.918 118.415,77.635 ; v1@117.199,78.263 cw(c116.644,77.142) 117.829,77.543 ; v1@117.199,78.263 cw(c116.644,77.142) 117.829,77.543 ; v1@117.199,78.263 cw(c116.644,77.142) 117.829,77.543 ; v1@117.221,78.258 cw(c117.221,76.88) 118.195,77.855 ; v1@117.221,78.258 cw(c117.221,76.88) 118.195,77.855 ; v1@117.221,78.258 cw(c117.221,76.88) 118.195,77.855 ; v1@117.256,78.273 cw(c118.813,76.716) 118.813,78.918 ; v1@117.256,78.273 cw(c118.813,76.716) 118.813,78.918 ; v1@117.256,78.273 cw(c118.813,76.716) 118.813,78.918 ; 117.291,78.759 cw(c115.621,77.089) v1@117.983,77.089 ; 117.291,78.759 cw(c115.621,77.089) v1@117.983,77.089 ; 117.291,78.759 cw(c115.621,77.089) v1@117.983,77.089 ; v1@118.021,77.138 ccw(c117.904,77.635) 118.415,77.635 ; v1@118.021,77.138 ccw(c117.904,77.635) 118.415,77.635 ; v1@118.021,77.138 ccw(c117.904,77.635) 118.415,77.635 ; v1@118.068,77.124 ccw(c118.96,78.017) 118.96,76.755 ; v1@118.068,77.124 ccw(c118.96,78.017) 118.96,76.755 ; v1@118.068,77.124 ccw(c118.96,78.017) 118.96,76.755 ; 118.389,76.708 118.415,76.733 ; 118.389,76.708 118.415,76.708 118.415,76.733 ; 118.411,78.918 cw(c118.411,77.133) BT.1@119.673,78.395 ; 118.411,78.918 cw(c118.411,77.133) BT.1@119.673,78.395 ; 118.411,78.918 cw(c118.411,77.133) BT.1@119.673,78.395 ; 118.415,76.733 118.436,76.755 118.462,76.755 120.735,76.755 120.752,76.771 121.221,76.771 121.552,77.102 121.552,78.918 ; 118.415,76.733 v1@118.415,77.079 ; v1@118.415,77.079 118.415,77.635 ; 118.994,78.787 ccw(c119.359,79.419) BT.1@119.725,78.788 ; 118.994,78.787 ccw(c119.359,79.419) BT.1@119.725,78.788 ; 118.994,78.787 ccw(c119.359,79.419) BT.1@119.725,78.788 ; BT.1@120.989,78.5 cw(c121.552,78.33) 121.552,78.918 ; BT.1@120.989,78.5 cw(c121.552,78.33) 121.552,78.918 ; BT.1@120.989,78.5 cw(c121.552,78.33) 121.552,78.918 ; BT.1@120.999,78.545 ccw(c121.876,78.448) 121.3,77.78 ; BT.1@120.999,78.545 ccw(c121.876,78.448) 121.3,77.78 ; BT.1@120.999,78.545 ccw(c121.876,78.448) 121.3,77.78
  Bottom Layer w0.9: v13@85.293,77.292 v13@85.344,77.343 ; 106.829,77.473 105.896,77.473 85.3,77.473 v13@85.344,77.343 ; 107.732,77.079 107.224,77.079 85.3,77.079 v13@85.344,77.343 ; v13@85.443,77.204 cw(c85.674,76.62) 85.988,77.164 ; v13@85.443,77.204 cw(c85.674,76.62) 85.988,77.164 ; v13@85.443,77.204 cw(c85.674,76.62) 85.988,77.164 ; v13@85.494,77.237 cw(c86.064,76.666) 86.064,77.473 ; v13@85.494,77.237 cw(c86.064,76.666) 86.064,77.473 ; v13@85.494,77.237 cw(c86.064,76.666) 86.064,77.473 ; v13@85.494,77.449 ccw(c86.388,78.343) 86.388,77.079 ; v13@85.494,77.449 ccw(c86.388,78.343) 86.388,77.079 ; v13@85.494,77.449 ccw(c86.388,78.343) 86.388,77.079
  Bottom Layer w1: v1@114.935,72.314 114.935,66.675 115.951,65.659 ; 118.389,76.683 118.212,76.505 ; 118.389,76.708 118.389,77.079 v1@118.389,77.14 ; 114.267,73 cw(c114.267,71.646) v1@115.224,72.603 ; 114.267,73 cw(c114.267,71.646) v1@115.224,72.603 ; 114.267,73 cw(c114.267,71.646) v1@115.224,72.603 ; 114.376,73.685 ccw(c114.376,77.075) POWS.2@117.147,75.122 ; 114.376,73.685 ccw(c114.376,77.075) POWS.2@117.147,75.122 ; 114.376,73.685 ccw(c114.376,77.075) POWS.2@117.147,75.122 ; 114.376,73.685 117.678,73.685 ; POWS.3@114.73,74.496 cw(c114.988,72.649) 116.218,74.051 ; POWS.3@114.73,74.496 cw(c114.988,72.649) 116.218,74.051 ; POWS.3@114.73,74.496 cw(c114.988,72.649) 116.218,74.051 ; 114.935,66.97 cw(c115.682,66.97) v1@115.154,67.498 ; 114.935,66.97 cw(c115.682,66.97) v1@115.154,67.498 ; 114.935,66.97 cw(c115.682,66.97) v1@115.154,67.498 ; v1@114.935,67.599 ccw(c116.722,67.599) v1@115.458,66.335 ; v1@114.935,67.599 ccw(c116.722,67.599) v1@115.458,66.335 ; v1@114.935,67.599 ccw(c116.722,67.599) v1@115.458,66.335 ; 114.935,67.955 ccw(c115.682,67.955) v1@115.154,67.427 ; 114.935,67.955 ccw(c115.682,67.955) v1@115.154,67.427 ; 114.935,67.955 ccw(c115.682,67.955) v1@115.154,67.427 ; 114.935,68.24 cw(c115.682,68.24) v1@115.154,68.768 ; 114.935,68.24 cw(c115.682,68.24) v1@115.154,68.768 ; 114.935,68.24 cw(c115.682,68.24) v1@115.154,68.768 ; 114.935,69.225 ccw(c115.682,69.225) v1@115.154,68.697 ; 114.935,69.225 ccw(c115.682,69.225) v1@115.154,68.697 ; 114.935,69.225 ccw(c115.682,69.225) v1@115.154,68.697 ; 114.935,69.423 cw(c115.768,69.423) v1@115.179,70.012 ; 114.935,69.423 cw(c115.768,69.423) v1@115.179,70.012 ; 114.935,69.423 cw(c115.768,69.423) v1@115.179,70.012 ; 114.935,70.531 ccw(c115.768,70.531) v1@115.179,69.942 ; 114.935,70.531 ccw(c115.768,70.531) v1@115.179,69.942 ; 114.935,70.531 ccw(c115.768,70.531) v1@115.179,69.942 ; 114.935,70.693 cw(c115.768,70.693) v1@115.179,71.282 ; 114.935,70.693 cw(c115.768,70.693) v1@115.179,71.282 ; 114.935,70.693 cw(c115.768,70.693) v1@115.179,71.282 ; 114.935,71.801 ccw(c115.768,71.801) v1@115.179,71.212 ; 114.935,71.801 ccw(c115.768,71.801) v1@115.179,71.212 ; 114.935,71.801 ccw(c115.768,71.801) v1@115.179,71.212 ; 114.935,72.075 cw(c115.682,72.075) v1@115.154,72.603 ; 114.935,72.075 cw(c115.682,72.075) v1@115.154,72.603 ; 114.935,72.075 cw(c115.682,72.075) v1@115.154,72.603 ; POWS.3@115.007,75.114 ccw(c117.678,76.897) 117.678,73.685 ; POWS.3@115.007,75.114 ccw(c117.678,76.897) 117.678,73.685 ; POWS.3@115.007,75.114 ccw(c117.678,76.897) 117.678,73.685 ; v1@115.139,67.462 ccw(c117.532,67.462) 115.84,65.77 ; v1@115.139,67.462 ccw(c117.532,67.462) 115.84,65.77 ; v1@115.139,67.462 ccw(c117.532,67.462) 115.84,65.77 ; v1@115.154,72.603 cw(c116.111,71.646) 116.111,73 ; v1@115.154,72.603 cw(c116.111,71.646) 116.111,73 ; v1@115.154,72.603 cw(c116.111,71.646) 116.111,73 ; 115.537,73 cw(c115.537,71.646) v1@116.494,72.603 ; 115.537,73 cw(c115.537,71.646) v1@116.494,72.603 ; 115.537,73 cw(c115.537,71.646) v1@116.494,72.603 ; 115.854,74.044 cw(c117.15,72.489) POWS.2@117.421,74.495 ; 115.854,74.044 cw(c117.15,72.489) POWS.2@117.421,74.495 ; 115.854,74.044 cw(c117.15,72.489) POWS.2@117.421,74.495 ; 116.305,73.685 ccw(c116.305,75.716) POWS.2@117.964,74.546 ; 116.305,73.685 ccw(c116.305,75.716) POWS.2@117.964,74.546 ; 116.305,73.685 ccw(c116.305,75.716) POWS.2@117.964,74.546 ; v1@116.423,72.602 cw(c117.348,71.724) 117.348,73 ; v1@116.423,72.602 cw(c117.348,71.724) 117.348,73 ; v1@116.423,72.602 cw(c117.348,71.724) 117.348,73 ; 116.858,73 cw(c116.858,71.646) v1@117.815,72.603 ; 116.858,73 cw(c116.858,71.646) v1@117.815,72.603 ; 116.858,73 cw(c116.858,71.646) v1@117.815,72.603 ; 117.076,73.805 ccw(c116.69,74.268) POWS.2@117.161,74.643 ; 117.076,73.805 ccw(c116.69,74.268) POWS.2@117.161,74.643 ; 117.076,73.805 ccw(c116.69,74.268) POWS.2@117.161,74.643 ; 117.348,73 114.046,73 114.046,66.192 115.468,64.77 118.212,64.77 118.212,76.505 ; POWS.2@117.391,74.609 cw(c115.41,72.628) v1@118.212,72.628 ; POWS.2@117.391,74.609 cw(c115.41,72.628) v1@118.212,72.628 ; POWS.2@117.391,74.609 cw(c115.41,72.628) v1@118.212,72.628 ; POWS.2@117.476,75.239 ccw(c116.755,76.505) 118.212,76.505 ; POWS.2@117.476,75.239 ccw(c116.755,76.505) 118.212,76.505 ; POWS.2@117.476,75.239 ccw(c116.755,76.505) 118.212,76.505 ; v1@117.814,72.532 ccw(c117.269,73.101) 118.03,73.305 ; v1@117.814,72.532 ccw(c117.269,73.101) 118.03,73.305 ; v1@117.814,72.532 ccw(c117.269,73.101) 118.03,73.305 ; v1@117.814,72.532 ccw(c117.269,73.101) 118.03,73.305 ; v1@117.814,72.532 ccw(c117.269,73.101) 118.03,73.305 ; v1@117.814,72.532 ccw(c117.269,73.101) 118.03,73.305 ; v1@117.815,67.427 ccw(c116.858,68.384) 118.212,68.384 ; v1@117.815,67.427 ccw(c116.858,68.384) 118.212,68.384 ; v1@117.815,67.427 ccw(c116.858,68.384) 118.212,68.384 ; v1@117.815,67.498 cw(c116.858,66.541) 118.212,66.541 ; v1@117.815,67.498 cw(c116.858,66.541) 118.212,66.541 ; v1@117.815,67.498 cw(c116.858,66.541) 118.212,66.541 ; v1@117.815,68.697 ccw(c116.858,69.654) 118.212,69.654 ; v1@117.815,68.697 ccw(c116.858,69.654) 118.212,69.654 ; v1@117.815,68.697 ccw(c116.858,69.654) 118.212,69.654 ; v1@117.815,68.768 cw(c116.858,67.811) 118.212,67.811 ; v1@117.815,68.768 cw(c116.858,67.811) 118.212,67.811 ; v1@117.815,68.768 cw(c116.858,67.811) 118.212,67.811 ; v1@117.815,72.532 ccw(c116.858,73.49) 118.212,73.49 ; v1@117.815,72.532 ccw(c116.858,73.49) 118.212,73.49 ; v1@117.815,72.532 ccw(c116.858,73.49) 118.212,73.49 ; v1@117.815,72.603 cw(c116.858,71.646) 118.212,71.646 ; v1@117.815,72.603 cw(c116.858,71.646) 118.212,71.646 ; v1@117.815,72.603 cw(c116.858,71.646) 118.212,71.646 ; v1@117.841,69.942 ccw(c116.945,70.837) 118.212,70.837 ; v1@117.841,69.942 ccw(c116.945,70.837) 118.212,70.837 ; v1@117.841,69.942 ccw(c116.945,70.837) 118.212,70.837 ; v1@117.841,70.012 cw(c116.945,69.117) 118.212,69.117 ; v1@117.841,70.012 cw(c116.945,69.117) 118.212,69.117 ; v1@117.841,70.012 cw(c116.945,69.117) 118.212,69.117 ; v1@117.841,71.212 ccw(c116.945,72.107) 118.212,72.107 ; v1@117.841,71.212 ccw(c116.945,72.107) 118.212,72.107 ; v1@117.841,71.212 ccw(c116.945,72.107) 118.212,72.107 ; v1@117.841,71.282 cw(c116.945,70.387) 118.212,70.387 ; v1@117.841,71.282 cw(c116.945,70.387) 118.212,70.387 ; v1@117.841,71.282 cw(c116.945,70.387) 118.212,70.387 ; 118.005,73.547 cw(c118.973,74.106) POWS.2@118.016,74.685 ; 118.005,73.547 cw(c118.973,74.106) POWS.2@118.016,74.685 ; 118.005,73.547 cw(c118.973,74.106) POWS.2@118.016,74.685
  Bottom Layer w1.2: v13(85.388,77.343) v13@85.598,77.343
  Bottom Layer w1.3: 118.608,78.537 118.461,78.389 119.278,77.572 119.771,77.079 ; 120.828,77.079 120.828,77.47
  Bottom Layer w2: 113.995,77.114 113.995,77.079 113.995,76.708 113.995,73.609 114.605,73 ; 117.348,73 117.729,73.381 117.729,76.022 118.212,76.505 ; 118.389,76.683 118.415,76.708 118.462,76.755 118.785,77.079 119.278,77.572 BT.1@119.99,78.283 ; 113.375,77.62 cw(c113.249,77.151) 113.67,77.394 ; 113.375,77.62 cw(c113.249,77.151) 113.67,77.394 ; 113.375,77.62 cw(c113.249,77.151) 113.67,77.394 ; 113.375,77.62 cw(c113.249,77.151) 113.67,77.394 ; 113.375,77.62 cw(c113.249,77.151) 113.67,77.394 ; 113.375,77.62 cw(c113.249,77.151) 113.67,77.394 ; 113.375,77.62 cw(c113.249,77.151) 113.67,77.394 ; 113.375,77.62 cw(c113.249,77.151) 113.67,77.394 ; 113.375,77.62 cw(c113.249,77.151) 113.67,77.394 ; 113.375,77.62 cw(c113.249,77.151) 113.67,77.394 ; 113.375,77.62 cw(c113.249,77.151) 113.67,77.394 ; 113.375,77.62 cw(c113.249,77.151) 113.67,77.394 ; 113.375,77.62 cw(c113.249,77.151) 113.67,77.394 ; 113.375,77.62 cw(c113.249,77.151) 113.67,77.394 ; 113.375,77.62 cw(c113.249,77.151) 113.67,77.394 ; 113.622,77.478 cw(c112.719,76.576) 113.995,76.576 ; 113.622,77.478 cw(c112.719,76.576) 113.995,76.576 ; 113.622,77.478 cw(c112.719,76.576) 113.995,76.576 ; 113.622,77.478 cw(c112.719,76.576) 113.995,76.576 ; 113.622,77.478 cw(c112.719,76.576) 113.995,76.576 ; 113.622,77.478 cw(c112.719,76.576) 113.995,76.576 ; 113.622,77.478 cw(c112.719,76.576) 113.995,76.576 ; 113.622,77.478 cw(c112.719,76.576) 113.995,76.576 ; 113.622,77.478 cw(c112.719,76.576) 113.995,76.576 ; 113.622,77.478 cw(c112.719,76.576) 113.995,76.576 ; 113.622,77.478 cw(c112.719,76.576) 113.995,76.576 ; 113.622,77.478 cw(c112.719,76.576) 113.995,76.576 ; 113.622,77.478 cw(c112.719,76.576) 113.995,76.576 ; 113.622,77.478 cw(c112.719,76.576) 113.995,76.576 ; 113.622,77.478 cw(c112.719,76.576) 113.995,76.576 ; 113.995,75.806 ccw(c115.389,75.806) POWS.3@114.403,74.821 ; 113.995,75.806 ccw(c115.389,75.806) POWS.3@114.403,74.821 ; 113.995,75.806 ccw(c115.389,75.806) POWS.3@114.403,74.821 ; 113.995,75.806 ccw(c115.389,75.806) POWS.3@114.403,74.821 ; 113.995,75.806 ccw(c115.389,75.806) POWS.3@114.403,74.821 ; 113.995,75.806 ccw(c115.389,75.806) POWS.3@114.403,74.821 ; 113.995,75.806 ccw(c115.389,75.806) POWS.3@114.403,74.821 ; 113.995,75.806 ccw(c115.389,75.806) POWS.3@114.403,74.821 ; 113.995,75.806 ccw(c115.389,75.806) POWS.3@114.403,74.821 ; 113.995,76.395 cw(c115.526,76.395) 114.444,77.478 ; 113.995,76.395 cw(c115.526,76.395) 114.444,77.478 ; 113.995,76.395 cw(c115.526,76.395) 114.444,77.478 ; 113.995,76.395 cw(c115.526,76.395) 114.444,77.478 ; 113.995,76.395 cw(c115.526,76.395) 114.444,77.478 ; 113.995,76.395 cw(c115.526,76.395) 114.444,77.478 ; 113.995,76.395 cw(c115.526,76.395) 114.444,77.478 ; 113.995,76.395 cw(c115.526,76.395) 114.444,77.478 ; 113.995,76.395 cw(c115.526,76.395) 114.444,77.478 ; 113.995,76.395 cw(c115.526,76.395) 114.444,77.478 ; 113.995,76.395 cw(c115.526,76.395) 114.444,77.478 ; 113.995,76.395 cw(c115.526,76.395) 114.444,77.478 ; 113.995,76.395 cw(c115.526,76.395) 114.444,77.478 ; 113.995,76.395 cw(c115.526,76.395) 114.444,77.478 ; 113.995,76.395 cw(c115.526,76.395) 114.444,77.478 ; 114.395,77.394 cw(c114.816,77.151) 114.69,77.62 ; 114.395,77.394 cw(c114.816,77.151) 114.69,77.62 ; 114.395,77.394 cw(c114.816,77.151) 114.69,77.62 ; 114.395,77.394 cw(c114.816,77.151) 114.69,77.62 ; 114.395,77.394 cw(c114.816,77.151) 114.69,77.62 ; 114.395,77.394 cw(c114.816,77.151) 114.69,77.62 ; 114.395,77.394 cw(c114.816,77.151) 114.69,77.62 ; 114.395,77.394 cw(c114.816,77.151) 114.69,77.62 ; 114.395,77.394 cw(c114.816,77.151) 114.69,77.62 ; 114.395,77.394 cw(c114.816,77.151) 114.69,77.62 ; 114.395,77.394 cw(c114.816,77.151) 114.69,77.62 ; 114.395,77.394 cw(c114.816,77.151) 114.69,77.62 ; 114.395,77.394 cw(c114.816,77.151) 114.69,77.62 ; 114.395,77.394 cw(c114.816,77.151) 114.69,77.62 ; 114.395,77.394 cw(c114.816,77.151) 114.69,77.62 ; POWS.3@114.496,74.954 ccw(c115.643,74.038) 114.605,73 ; POWS.3@114.496,74.954 ccw(c115.643,74.038) 114.605,73 ; POWS.3@114.496,74.954 ccw(c115.643,74.038) 114.605,73 ; POWS.2@117.574,74.892 cw(c119.929,74.892) 118.264,76.557 ; POWS.2@117.574,74.892 cw(c119.929,74.892) 118.264,76.557 ; POWS.2@117.574,74.892 cw(c119.929,74.892) 118.264,76.557 ; POWS.2@117.574,74.892 cw(c119.929,74.892) 118.264,76.557 ; POWS.2@117.574,74.892 cw(c119.929,74.892) 118.264,76.557 ; POWS.2@117.574,74.892 cw(c119.929,74.892) 118.264,76.557 ; POWS.2@117.574,74.892 cw(c119.929,74.892) 118.264,76.557 ; POWS.2@117.574,74.892 cw(c119.929,74.892) 118.264,76.557 ; 118.033,76.539 ccw(c118.033,77.054) 118.397,76.69 ; 118.033,76.539 ccw(c118.033,77.054) 118.397,76.69 ; 118.033,76.539 ccw(c118.033,77.054) 118.397,76.69 ; 118.033,76.539 ccw(c118.033,77.054) 118.397,76.69 ; 118.033,76.539 ccw(c118.033,77.054) 118.397,76.69 ; 118.033,76.539 ccw(c118.033,77.054) 118.397,76.69 ; 118.175,76.558 ccw(c118.052,77.016) 118.463,76.779 ; 118.175,76.558 ccw(c118.052,77.016) 118.463,76.779 ; 118.175,76.558 ccw(c118.052,77.016) 118.463,76.779 ; 118.212,76.505 ccw(c119.754,74.963) 117.574,74.888 cw(c119.754,74.963) 118.212,76.505 ; 118.343,76.659 ccw(c118.106,77.069) 118.564,76.947 ; 118.343,76.659 ccw(c118.106,77.069) 118.564,76.947 ; 118.343,76.659 ccw(c118.106,77.069) 118.564,76.947 ; 118.432,76.725 ccw(c118.068,77.089) 118.583,77.089 ; 118.432,76.725 ccw(c118.068,77.089) 118.583,77.089 ; 118.432,76.725 ccw(c118.068,77.089) 118.583,77.089
  other v1: 115.494,66.37 115.189,67.462 115.189,68.732 115.214,69.977 115.214,71.247 115.189,72.568 110.033,77.089 111.633,77.089 113.233,77.089 114.833,77.089 116.433,77.089 118.033,77.089 109.221,78.308 110.821,78.308 112.421,78.308 114.021,78.308 115.621,78.308 117.221,78.308